# EAGLE board dimmer.v2 (EAGLE 6.5.0)
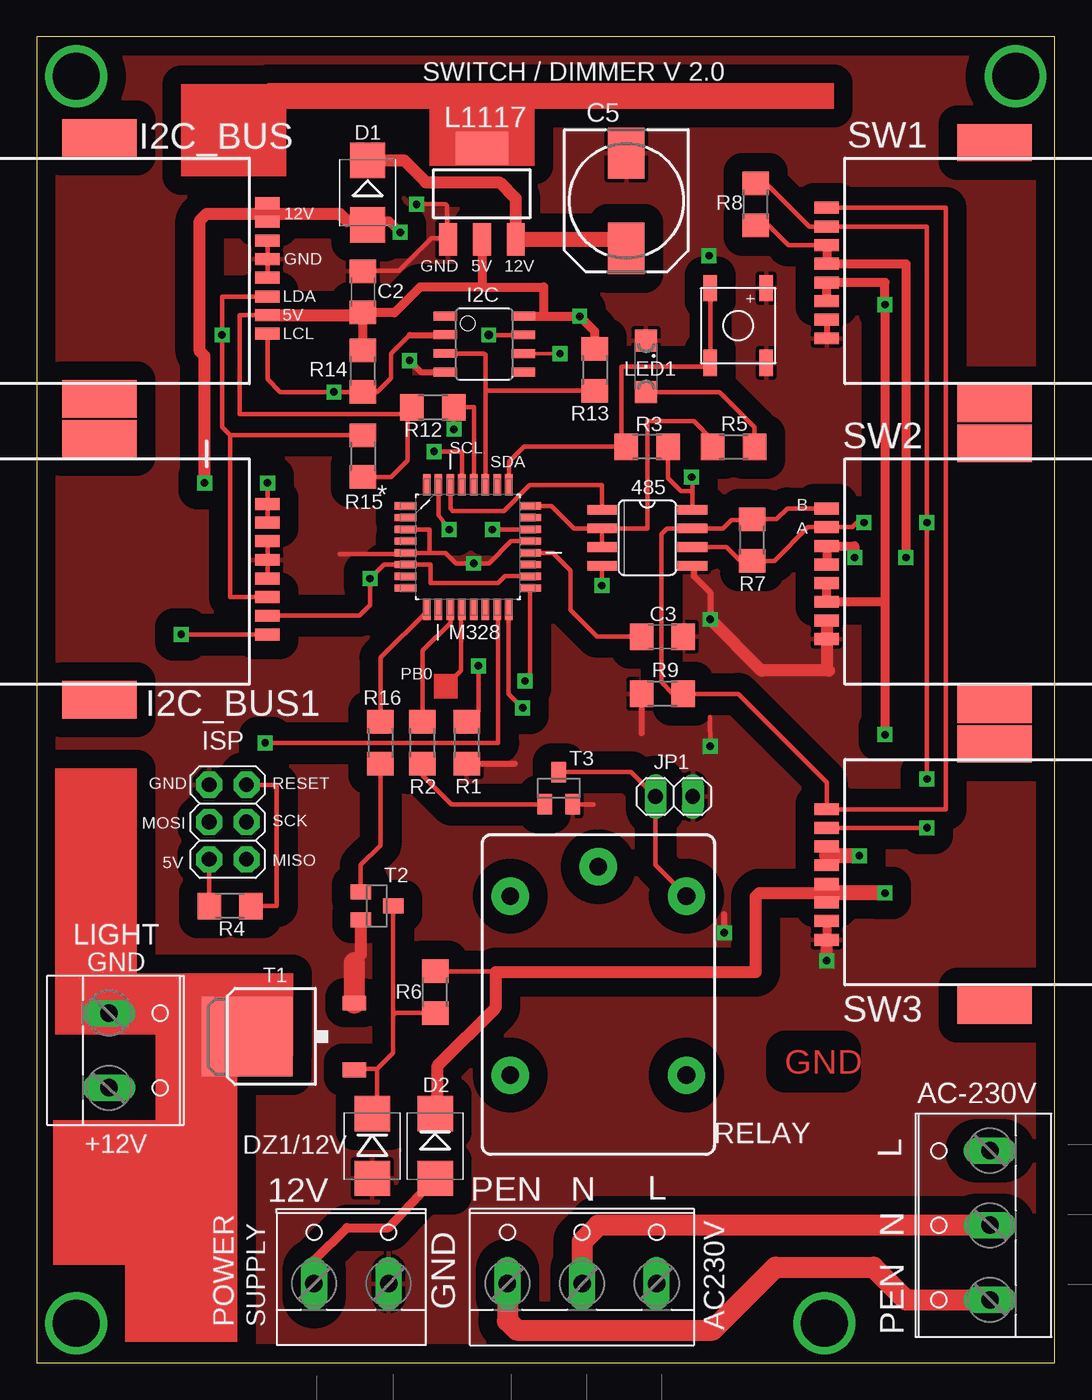
[diagram p0: board, top side]
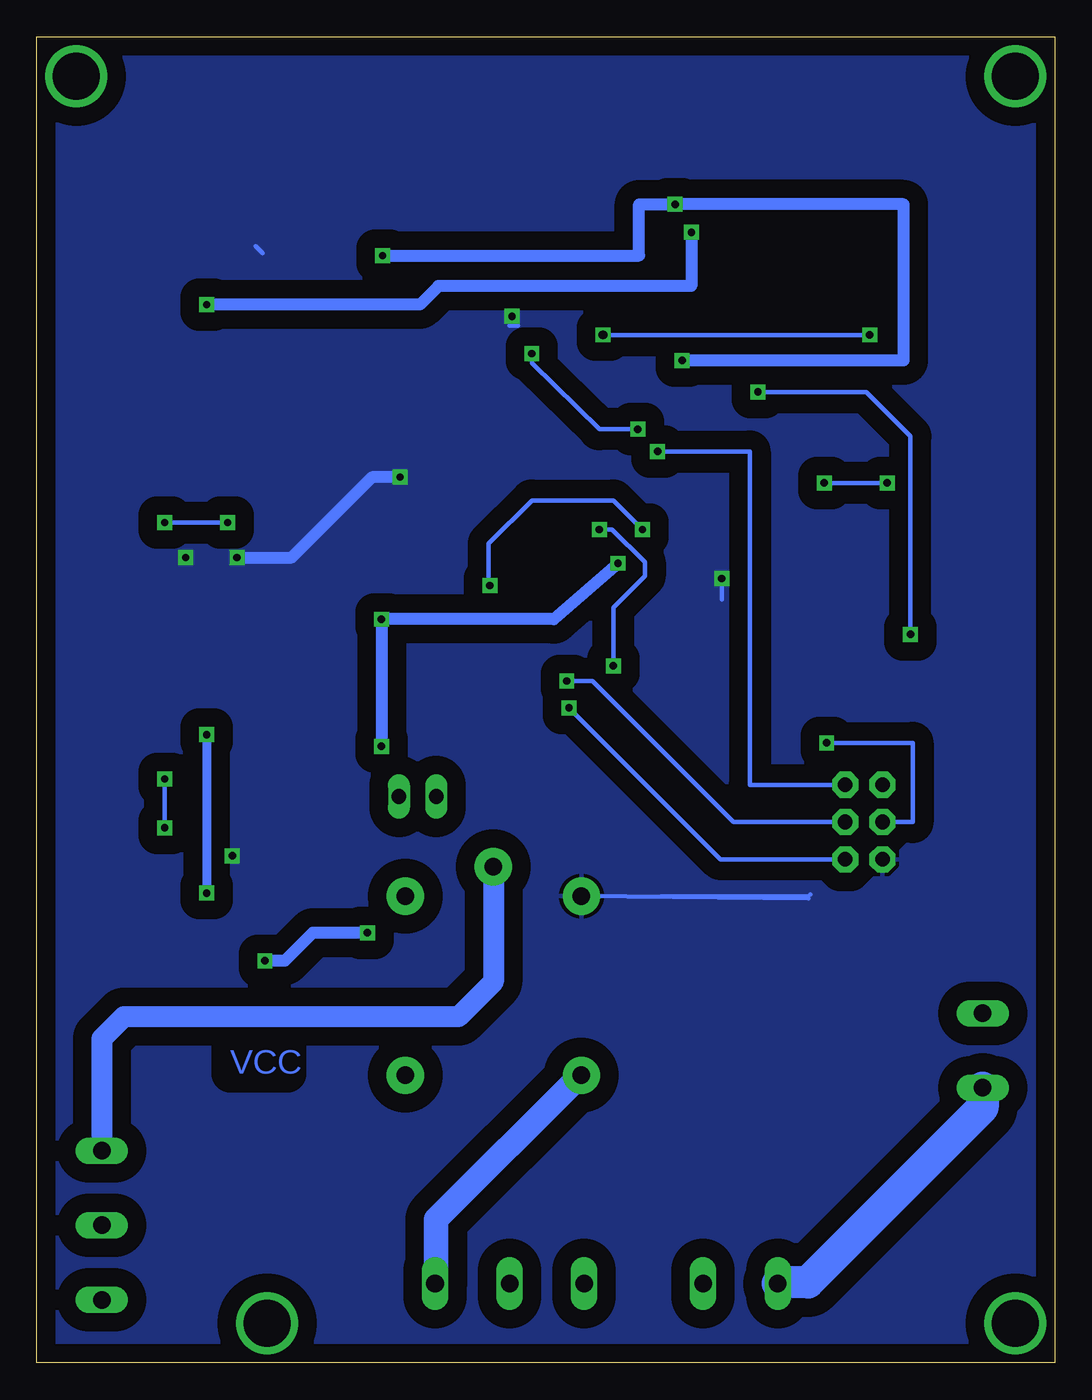
[diagram p1: board, bottom side, seen from below]

Size 69.36 x 90.32 mm. Coordinates in mm from the lower left corner, seen from the top.
Outline: 0,0 69.36,0 69.36,90.32 0,90.32 0,0
Copper layers (1*16): Top 0.035mm / dielectric 1.5mm / Bottom 0.035mm
Design rules "default": minimum track width 10mil, minimum drill 24mil, track to track 8mil, track to pad 8mil, pad to pad 8mil, via to via 8mil, smd to smd 8mil, copper to edge 40mil, drill to drill 8mil, minimum pad ring 10mil, minimum via ring 8mil, stop-mask expansion 4mil, vias tented up to drill 0mil, thermal gap 10mil

## Footprints (pad centres in the part's own frame; a part is rotated, then mirrored left to right if it is on the bottom)
SO08 = smd 0.66 x 2.032: 1 -1.905,-3.073; 2 -0.635,-3.073; 3 0.635,-3.073; 4 1.905,-3.073; 5 1.905,3.073; 6 0.635,3.073; 7 -0.635,3.073; 8 -1.905,3.073
W237-3E = drill 1.194 long: 1 -5.08,-0.635; 2 0,-0.635; 3 5.08,-0.635
C1206 = smd 1.6 x 1.8: 1 -1.4,0; 2 1.4,0
140CLH-0810 = smd 3.5 x 2.5: + 3.25,0; - -3.25,0
SMB = smd 2.4 x 2.4: A 2.2,0; C -2.2,0
SMB-DIODE = smd 2.4 x 2.4: A 2.2,0; C -2.2,0
P82B715SMD = smd 0.6 x 1.6: 1 -1.905,-2.654; 2 -0.645,-2.654; 3 0.625,-2.654; 4 1.895,-2.654; 5 1.905,2.654; 6 0.635,2.654; 7 -0.635,2.654; 8 -1.905,2.654
RJ45SMD = smd 0.813 x 1.676: P$1 -4.445,8.255; P$2 -3.175,8.255; P$3 -1.905,8.255; P$4 -0.635,8.255; P$5 0.635,8.255; P$6 1.905,8.255; P$7 3.175,8.255; P$8 4.445,8.255 | smd 2.54 x 5.08: P$9 8.89,-3.175; P$10 -8.89,-3.175
2X03 = drill 1 pad 1.778 octagon: 1 -2.54,-1.27; 2 -2.54,1.27; 3 0,-1.27; 4 0,1.27; 5 2.54,-1.27; 6 2.54,1.27
1X02 = drill 1 long: 1 -1.27,0; 2 1.27,0
SOT223 = smd 1.219 x 2.235: 1 -2.311,-3.099; 2 0,-3.099; 3 2.311,-3.099 | smd 3.6 x 2.2: 4 0,3.099
SML1206 = smd 1.5 x 1.5: A 1.75,0; C -1.75,0
W237-132 = drill 1.194 long: 1 -2.54,-0.635; 2 2.54,-0.635
QFP80P900X900X120-32N = smd 1.473 x 0.508: 1 -4.242,2.794; 2 -4.242,2.007; 3 -4.242,1.194; 4 -4.242,0.406; 5 -4.242,-0.406; 6 -4.242,-1.194; 7 -4.242,-2.007; 8 -4.242,-2.794; 17 4.242,-2.794; 18 4.242,-2.007; 19 4.242,-1.194; 20 4.242,-0.406; 21 4.242,0.406; 22 4.242,1.194; 23 4.242,2.007; 24 4.242,2.794 | smd 0.508 x 1.473: 9 -2.794,-4.242; 10 -2.007,-4.242; 11 -1.194,-4.242; 12 -0.406,-4.242; 13 0.406,-4.242; 14 1.194,-4.242; 15 2.007,-4.242; 16 2.794,-4.242; 25 2.794,4.242; 26 2.007,4.242; 27 1.194,4.242; 28 0.406,4.242; 29 -0.406,4.242; 30 -1.194,4.242; 31 -2.007,4.242; 32 -2.794,4.242
MINISMD = smd 1.778 x 0.914: P$1 -2.223,3.175; P$2 -2.223,-0.635; P$3 2.857,3.175; P$4 2.857,-0.635
R1206 = smd 1.6 x 1.803: 1 -1.422,0; 2 1.422,0
JS-M = drill 1.2 pad 2.54: 1 6.7,6; 2 6.7,-6; C 8.7,0; NC -5.5,-6; NO -5.5,6
D-PAK_TO252AA = smd 1 x 1.6: 1 -2.28,-4.8; 3 2.28,-4.8 | smd 5.4 x 6.2: 4 0,2.5
SOT23 = smd 1 x 1.4: 1 -0.95,-1.1; 2 0.95,-1.1; 3 0,1.1

## Placement (x,y rotation side)
485  MAX485SMD  [SO08]  41.59,56.2 270 top
AC230V  [W237-3E]  37.15,6.03 0 top
AC-230V  [W237-3E]  64.29,9.37 90 top
C2  100nF  [C1206]  22.23,72.95 90 top
C3  100nF  [C1206]  42.62,49.45 0 top
C5  100uF  [140CLH-0810]  40.16,79.14 270 top
D1  M1  [SMB]  22.54,79.69 270 top
D2  M1  [SMB]  27.15,14.76 270 top
DZ1/12V  DIODE-ZENERSMB  [SMB-DIODE]  22.86,14.76 270 top
I2C  P82B715  [P82B715SMD]  30.48,69.37 270 top
I2C_BUS  RJ45SMD  [RJ45SMD]  7.46,74.53 270 top
I2C_BUS1  RJ45SMD  [RJ45SMD]  7.46,54.05 270 top
ISP  [2X03]  13.02,36.83 90 top
JP1  [1X02]  43.42,38.58 180 top
L1117  [SOT223]  30.32,79.61 0 top
LED1  [SML1206]  41.51,67.87 270 top
LIGHT  [W237-132]  5.56,21.27 270 top
M328  ATMEGA328P-AU  [QFP80P900X900X120-32N]  29.37,55.56 0 top
POWER  [W237-132]  21.43,6.03 0 top
PROG  MIMISMD  [MINISMD]  49.05,70.33 90 top
R1  10k  [R1206]  29.29,42.23 90 top
R2  680  [R1206]  26.27,42.23 270 top
R3  10k  [R1206]  41.59,62.39 0 top
R4  10k  [R1206]  13.18,31.11 0 top
R5  680  [R1206]  47.47,62.39 180 top
R6  1K  [R1206]  27.15,25.24 270 top
R7  120  [R1206]  48.74,56.04 270 top
R8  10k  [R1206]  48.97,78.9 270 top
R9  10k  [R1206]  42.62,45.56 0 top
R12  4k7  [R1206]  26.99,65.09 180 top
R13  4k7  [R1206]  38.02,67.63 90 top
R14  470  [R1206]  22.23,67.55 270 top
R15  470  [R1206]  22.23,61.75 90 top
R16  680  [R1206]  23.42,42.23 90 top
RELAY  JS-M1-9V-4  [JS-M]  38.26,25.08 90 top
SW1  RJ45SMD  [RJ45SMD]  62.07,74.22 90 top
SW2  RJ45SMD  [RJ45SMD]  62.07,53.74 90 top
SW3  RJ45SMD  [RJ45SMD]  62.07,33.26 90 top
T1  IRFR5305  [D-PAK_TO252AA]  16.83,22.22 90 top
T2  BC847BSMD  [SOT23]  23.18,31.11 270 top
T3  BC847BSMD  [SOT23]  35.56,39.13 0 top

## Library data of the parts
485 = maxim
AC230V AC-230V LIGHT POWER = con-wago-508; OC_FARNELL: unknown; OC_NEWARK: unknown
C2 C3 C5 R1-R9 R12-R16 = rcl
D1 D2 = diode
DZ1/12V L1117 = sparkfun
I2C = i2c
I2C_BUS I2C_BUS1 SW1-SW3 = con-tycoelectronics
ISP JP1 = pinhead
LED1 = led
M328 = atmega328; MPN: ATMEGA328P-AU; OC_FARNELL: 1715486; OC_NEWARK: 14R4631; PACKAGE: TQFP-32; SUPPLIER: Atmel
PROG = switch-misc
RELAY = relay; OC_FARNELL: unknown; OC_NEWARK: unknown
T1 = transistor-power
T2 T3 = transistor-npn

## Nets
12V: D2.A LIGHT.2 POWER.1
+12V: D1.A D2.C I2C_BUS1.P$1 I2C_BUS1.P$2 I2C_BUS.P$1 I2C_BUS.P$2 R6.1 SW1.P$3 SW1.P$4 SW2.P$3 SW2.P$4 SW3.P$3 SW3.P$4
A: 485.6 R7.2 R8.1 SW1.P$7 SW2.P$7 SW3.P$7
B: 485.7 R7.1 R9.2 SW1.P$8 SW2.P$8 SW3.P$8
GND: 485.5 C2.2 C3.2 C5.- DZ1/12V.A I2C.4 I2C_BUS1.P$3 I2C_BUS1.P$4 I2C_BUS1.P$5 I2C_BUS.P$3 I2C_BUS.P$4 I2C_BUS.P$5 ISP.6 JP1.1 L1117.1 LED1.C M328.3 M328.5 M328.21 POWER.2 PROG.P$2 PROG.P$4 R1.1 R9.1 SW1.P$1 SW1.P$2 SW2.P$1 SW2.P$2 SW3.P$1 SW3.P$2 T1.3 T2.2 T3.2
IN: C5.+ D1.C L1117.3
LX: I2C.2 I2C_BUS1.P$8 I2C_BUS.P$8 R14.2
LY: I2C.7 I2C_BUS1.P$6 I2C_BUS.P$6 R15.2
MISO: ISP.1 M328.16
MOSI: ISP.4 M328.15
N$2: R16.1 T2.1
N$4: 485.4 M328.31
N$5: 485.1 M328.30
N$6: M328.25 PROG.P$1 PROG.P$3 R3.1
N$7: M328.9 R16.2
N$8: AC230V.3 RELAY.NO
N$9: AC230V.1 AC-230V.1
N$10: AC230V.2 AC-230V.2
N$12: DZ1/12V.C R6.2 T1.1 T2.3
N$13: R2.2 T3.1
N$15: LIGHT.1 T1.4
N$16: AC-230V.3 RELAY.C
N$18: 485.2 485.3 M328.24 R5.2
N$26: M328.22 R1.2
N$33: M328.11 R2.1
N$36: C3.1 M328.20
N$41: JP1.2 RELAY.2 T3.3
N$48: LED1.A R5.1
N$49: M328.7
N$50: M328.8
RESET: ISP.5 M328.29 R4.2
SCK: ISP.3 M328.17
SCL: I2C.6 M328.28 R12.1
SDA: I2C.3 M328.27 R13.1
VCC: 485.8 C2.1 I2C.8 I2C_BUS1.P$7 I2C_BUS.P$7 ISP.2 L1117.2 M328.6 M328.18 R3.2 R4.1 R8.2 R12.2 R13.2 R14.1 R15.1 RELAY.1 SW1.P$5 SW1.P$6 SW2.P$5 SW2.P$6 SW3.P$5 SW3.P$6
VCC_2: M328.4

## Tracks (layer width: path | path; a pad name or v marks a point on that pad's centre or on a via)
12V
  Top 0.61: POWER.1 18.89,6.99 21.14,9.21 23.97,9.21 D2.A
  Bottom 2.184: LIGHT.2 4.92,17.38 16.83,5.48 18.81,5.48 POWER.1
+12V  (via drill 0.5 pad 1.02)
  Top 0.305: D1.A 22.84,77.79 | I2C_BUS1.P$2 I2C_BUS1.P$1 v15.72,59.93 | R6.1 31.2,26.66 31.27,26.59
  Top 0.406: 27.47,26.99 R6.1 | 27.3,17.12 D2.C
  Top 0.61: 57.78,51.83 v57.78,72.07 57.78,73.58 SW1.P$4 SW1.P$3 | SW2.P$4 SW2.P$3 57.78,51.83 | 57.78,51.83 v57.78,42.78 | SW3.P$4 53.82,31.83 SW3.P$3 | 22.84,77.79 23.97,77.79 v24.77,76.99
  Top 0.813: 27.3,17.12 27.3,20.24 31.27,24.21 31.27,26.59 48.97,26.59 48.97,31.75 49.21,31.99 53.74,31.99 | 22.84,77.79 21.11,77.79 20.64,78.26 15.64,78.26 | v11.43,59.93 11.43,68.58 11.11,68.9 11.11,77.79 11.59,78.26 15.64,78.26 | 15.64,78.26 15.64,77.79 I2C_BUS.P$2 I2C_BUS.P$1
  Top 1.016: v57.78,31.99 53.74,31.99 53.82,31.83
  Bottom 0.305: v11.43,59.93 v15.72,59.93
  Bottom 0.61: v57.78,42.78 v57.78,31.99
  Bottom 0.813: v24.77,76.99 24.77,73.34 41.99,73.34 43.26,72.07 v57.78,72.07
A  (via drill 0.5 pad 1.02)
  Top 0.305: v60.64,39.77 v60.64,57.23 60.64,77.39 SW1.P$7 | SW3.P$7 v60.64,36.43 | SW1.P$7 53.66,77.39 | v56.36,57.23 55.88,57.23 55.56,56.91 SW2.P$7 52.55,56.91 50.25,54.62 R7.2 48.57,54.45 48.1,54.45 46.99,55.56 485.6 | R8.1 49.7,80.32 52.63,77.39 SW1.P$7
  Bottom 0.305: v60.64,39.77 v60.64,36.43 | v60.64,57.23 v56.36,57.23
B
  Top 0.305: SW1.P$8 61.91,78.66 61.91,37.7 SW3.P$8 53.82,39.53 47.78,45.56 R9.2 43.34,45.56 42.55,46.36 42.55,56.44 42.94,56.83 485.7 46.75,56.83 47.31,57.39 48.66,57.39 R7.1 50.4,57.46 51.12,58.18 SW2.P$8
GND  (via drill 0.5 pad 1.02)
  Top 0.305: SW3.P$1 53.81,28.65 | 21.63,27.27 21.59,27.31 | I2C_BUS.P$3 I2C_BUS.P$4 I2C_BUS.P$5 | 485.5 44.77,54.19 | I2C_BUS1.P$5 I2C_BUS1.P$4 I2C_BUS1.P$3 | 20.64,55.09 24.72,55.09 M328.5 26.75,55.17 | 26.75,55.17 26.75,56.75 26.67,56.76 M328.3 | 37.94,38.02 36.52,38.02 T3.2 | 45.87,43.98 v45.88,41.99 | v25.88,78.9 27.86,78.9 27.94,78.82 27.94,76.58 | 27.94,76.58 L1117.1 | M328.21 33.6,55.96 32.31,55.96 30.8,54.45 v29.77,54.45 28.58,54.45 27.86,55.17 26.75,55.17 | 27.94,76.58 26.89,76.58 24.69,74.37 22.25,74.37 C2.2
  Top 0.406: SW1.P$2 SW1.P$1 | R1.1 32.55,40.81 | v46.83,29.29 46.83,30.56 | 44.77,54.19 44.77,53.58 45.88,52.47 v45.88,50.64 | R9.1 41.2,42.87 41.2,42.86 | v25.4,68.26 26.19,67.47 I2C.4
  Top 0.61: SW3.P$2 SW3.P$1 | SW2.P$2 SW2.P$1
  Top 0.813: T2.2 22.08,27.79 21.59,27.31 | L1117.1 28.01,76.77 | v53.82,27.38 SW3.P$1 | SW2.P$2 53.82,47.31 53.98,47.15 49.37,47.15 v45.88,50.64 | C5.- 40.49,82.39
  Top 1.422: 21.63,27.27 T1.3
  Bottom 0.813: v25.4,68.26 10.32,68.26 10.32,78.9 v25.88,78.9 28.34,78.9 28.34,75.41 v45.8,75.41 | v29.77,54.45 34.13,50.64 v45.88,50.64 v45.88,41.99 | v46.83,29.29 50.56,29.29 52.47,27.38 v53.82,27.38
  pour Top (isolate 1.27): 0,90.33 69.53,90.33 69.53,0 0,0
IN
  Top 0.813: D1.C 25.03,81.89 26.51,80.41 31.51,80.41 32.62,79.3 32.62,76.52 L1117.3
  Top 1.016: L1117.3 39.38,76.51 C5.+
LX  (via drill 0.5 pad 1.02)
  Top 0.305: 25.4,70.01 24.13,68.74 24.13,67.07 23.18,66.12 R14.2 v20.24,66.12 | v9.84,49.61 I2C_BUS1.P$8 | I2C_BUS.P$8 15.72,66.99 16.59,66.12 v20.24,66.12 | 19.84,66.2 20.64,66.2 v20.24,66.12
  Top 0.406: 25.4,70.01 I2C.2
  Bottom 0.305: v20.24,66.12 12.86,66.12 9.84,63.1 v9.84,49.61
LY  (via drill 0.5 pad 1.02, 0.6)
  Top 0.305: I2C_BUS.P$6 12.62,72.63 v12.62,70.01 12.62,63.74 13.18,63.18 | I2C_BUS1.P$6 13.18,52.15 13.18,63.18 | 13.18,63.18 R15.2 | v30.8,70.01 I2C.7
  Bottom 0.305: v30.8,70.01 v12.62,70.01
MISO  (via drill 0.5 pad 1.02)
  Top 0.305: M328.16 32.15,51.31 32.15,45.56 v33.1,44.61
  Bottom 0.305: ISP.1 22.78,34.29 v33.1,44.61
MOSI  (via drill 0.5 pad 1.02)
  Top 0.305: v15.56,42.23 31.43,42.23 31.43,51.22 M328.15
  Bottom 0.305: v15.56,42.23 9.68,42.23 9.68,36.83 ISP.4
N$1
  Top 0.305: 28.89,51.36 28.89,47.15 27.86,46.12
N$2
  Top 0.305: 22.23,32.21 T2.1 22.07,33.89 23.42,35.24 R16.1
N$4  (via drill 0.5 pad 1.02)
  Top 0.305: M328.31 27.36,57.73 v28.1,56.75 | v38.5,52.94 38.5,54.27 485.4
  Bottom 0.305: v38.5,52.94 38.58,53.02 38.58,55.8 35.64,58.74 30.08,58.74 v28.1,56.75
N$5
  Top 0.305: 485.1 38.5,58.12 38.5,59.77 33.58,59.77 31.83,58.02 28.34,58.02 28.17,58.19 M328.30
N$6
  Top 0.305: 38.89,62.39 33.18,62.39 32.16,61.37 M328.25 | 38.89,62.39 R3.1 | PROG.P$3 PROG.P$1 45.64,67.87 39.85,67.87 39.85,62.47 38.89,62.39
N$7
  Top 0.305: M328.9 26.57,51.18 23.42,48.02 R16.2
N$8
  Bottom 1.676: RELAY.NO 32.33,19.58 42.15,9.76 42.15,5.48 AC230V.3
N$9
  Top 1.422: AC230V.1 32.07,2.86 32.7,2.22 46.04,2.22 50.32,6.51 56.99,6.51 59.21,4.29 AC-230V.1
N$10
  Top 1.422: AC-230V.2 38.26,9.37 37.15,8.26 AC230V.2
N$12
  Top 0.305: T2.3 24.28,23.65 | 24.28,23.65 24.28,21.1 23.18,20 | 23.18,20 21.68,20 T1.1 | R6.2 24.44,23.82 24.28,23.65 | 23.18,20 23.18,17.28 DZ1/12V.C
N$13
  Top 0.305: T3.1 34.6,38.02 28.26,38.02 26.27,40.01 R2.2
N$15
  Top 1.93: T1.4 14.29,23.81 LIGHT.1
N$16
  Bottom 1.422: AC-230V.3 64.93,22.07 63.42,23.57 40.64,23.57 38.26,25.96 RELAY.C
N$18
  Top 0.305: 485.2 485.3 | 485.2 41.59,56.83 41.59,64.14 44.77,64.14 46.04,62.86 R5.2 | 485.2 36.59,56.83 35.07,58.36 M328.24
N$19  (via drill 3.2)
  other vias: 2.7,87.63
N$20  (via drill 3.2)
  other vias: 66.68,87.63
N$21  (via drill 3.2)
  other vias: 2.7,2.7
N$22  (via drill 3.2)
  other vias: 53.66,2.7
N$26  (via drill 0.5 pad 1.02)
  Top 0.305: v31.04,56.75 M328.22 | v30.08,47.47 30.08,44.36 R1.2
  Bottom 0.305: v30.08,47.47 30.08,51.44 27.94,53.58 27.94,54.53 30.16,56.75 v31.04,56.75
N$33
  Top 0.305: M328.11 28.17,50.4 26.27,48.5 R2.1
N$36
  Top 0.305: M328.20 35.17,55.16 36.35,53.98 36.35,51.28 38.18,49.45 C3.1
N$41
  Top 0.305: T3.3 40.49,40.23 JP1.2 42.15,33.89 RELAY.2
N$48
  Top 0.305: R5.1 48.9,62.24 48.9,63.74 46.52,66.12 LED1.A
RESET  (via drill 0.5 pad 1.02)
  Top 0.305: v27.07,62.07 28.97,62.07 28.97,59.87 M328.29 | ISP.5 16.35,39.37 16.35,31.12 R4.2
  Bottom 0.305: v27.07,62.07 20.8,62.07 20.8,39.37 ISP.5
SCK  (via drill 0.5 pad 1.02)
  Top 0.305: M328.17 33.61,46.79 v33.26,46.43
  Bottom 0.305: ISP.3 21.91,36.83 31.51,46.43 v33.26,46.43
SCL  (via drill 0.5 pad 1.02)
  Top 0.254: I2C.6 v35.64,68.74
  Top 0.305: M328.28 29.77,65.08 29.77,65.09 R12.1 v28.41,63.59 v28.42,63.58
  Bottom 0.305: v28.42,63.58 31.04,63.58 35.64,68.1 v35.64,68.74
SDA
  Top 0.305: M328.27 30.56,66.28 | 30.56,66.28 30.56,68.66 30.47,68.75 I2C.3 | R13.1 30.63,66.21 30.56,66.28
VCC  (via drill 0.5 pad 1.02)
  Top 0.305: ISP.2 11.75,30.96 R4.1 | R12.2 25.25,64.61 | I2C_BUS.P$7 13.81,71.36 13.81,64.61 25.25,64.61 | v44.61,60.33 44.67,60.27 44.67,59.37 | 44.67,59.37 485.8 | 33.55,53.5 M328.18 33.59,53.58 31.91,53.58 31.43,53.1 26.83,53.1 26.83,54.37 M328.6 23.65,54.37 v22.7,53.42 22.7,51.59 21.99,50.88 I2C_BUS1.P$7 | 25.25,64.61 25.25,61.44 24.13,60.33 22.31,60.33 R15.1 | 22.25,71.52 C2.1 | R3.2 43.01,60.25 43.89,59.37 44.67,59.37 | R8.2 49.84,77.48 51.2,76.12 SW1.P$6
  Top 0.61: SW1.P$6 SW1.P$5 59.21,74.85 v59.21,54.85 | SW2.P$5 SW2.P$6 55.72,55.64 v55.72,54.85 | SW3.P$5 53.82,34.53 SW3.P$6 | R14.1 C2.1 | 30.32,76.6 L1117.2 30.32,73.26 | 30.32,73.26 26.11,73.26 24.37,71.52 22.25,71.52 | I2C.8 34.61,71.28 | 34.61,71.28 v36.99,71.28 38.02,70.25 R13.2 | 30.32,73.26 34.53,73.26 34.53,71.36 34.61,71.28
  Top 0.813: 22.12,71.44 C2.1 22.04,71.36 I2C_BUS.P$7
  Top 1.016: v56.04,34.53 53.82,34.53
  Bottom 0.305: RELAY.1 16.79,31.62 | 16.67,31.91 16.83,31.75 26.83,31.75 | 53.98,75.57 54.45,76.04 | v36.99,71.28 36.59,70.64 37.15,70.64 | v22.7,53.42 22.7,51.99
  Bottom 0.813: v44.61,60.33 46.51,60.33 51.99,54.85 v55.72,54.85
  pour Bottom (isolate 1.27): 0,90.33 69.37,90.33 69.37,0.32 0,0.32
(copper drawn outside any net)
  shapes: Top area x13

## Text on the board
Top: GND
Bottom: VCC
tNames: SWITCH / DIMMER V 2.0 | 12V | GND | GND | 5V | 12V | LDA | + | 5V | LCL | SCL | SDA | B | A | PB0 | GND | RESET | MOSI | SCK | 5V | MISO | GND | +12V | L | 12V | PEN | N | L | N | GND | SUPPLY | PEN
tDocu: Raspberry PI I2C / expander board | wall switch | switching power supply